# EAGLE board serial-adapter-board (EAGLE 5.07)
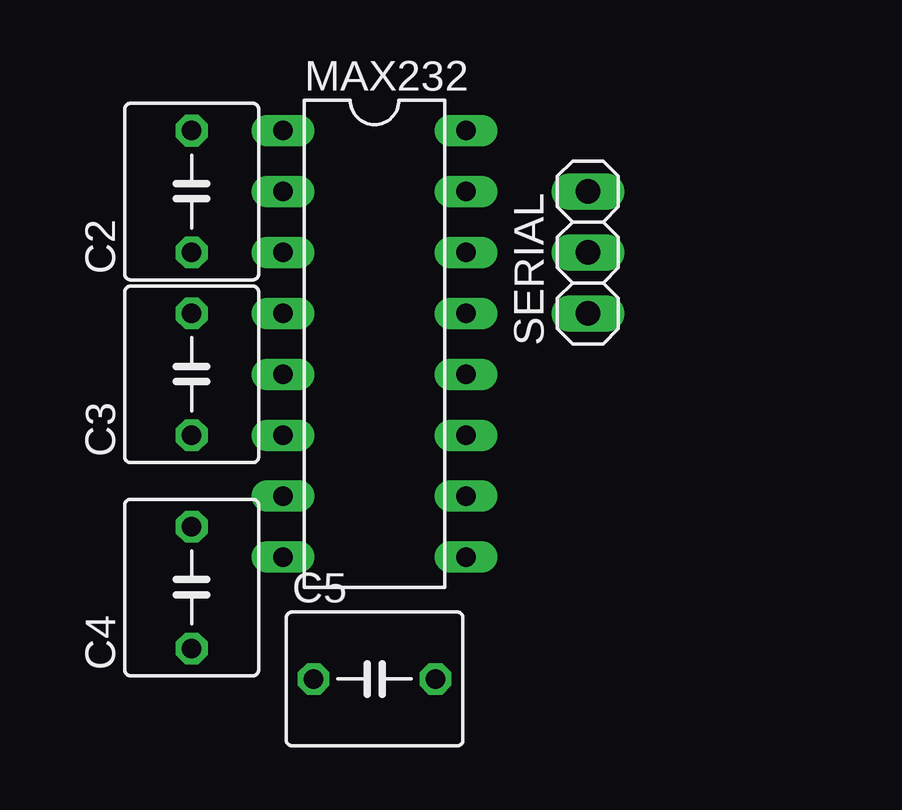
[diagram p0: board, top side]
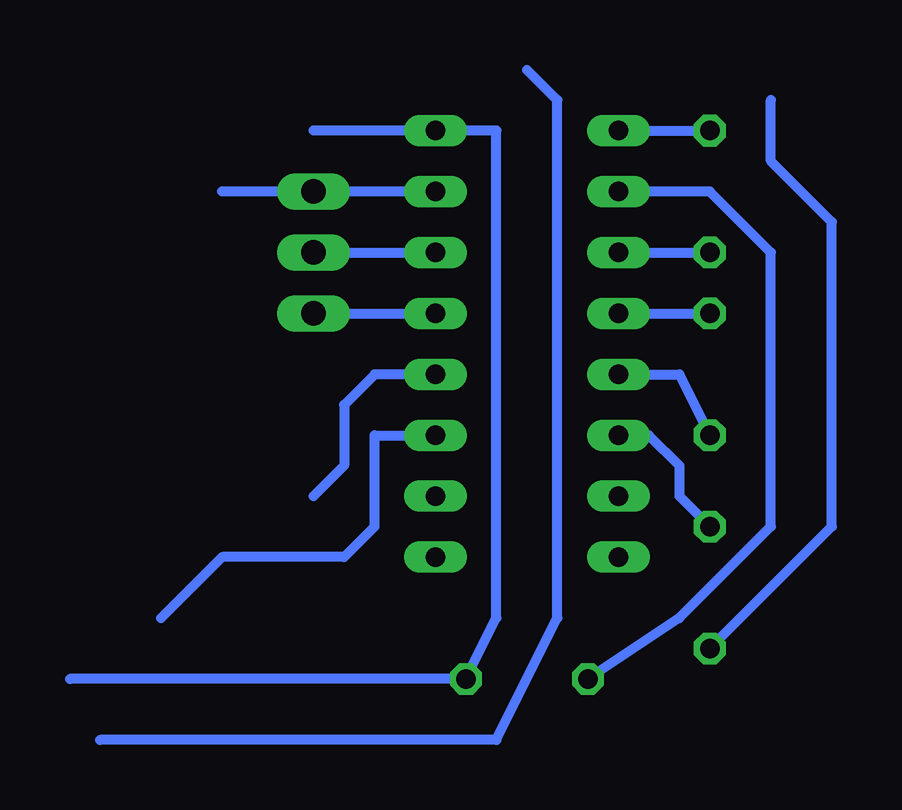
[diagram p1: board, bottom side, seen from below]

No outline drawn. Coordinates in mm, seen from the top.
Copper layers (1*16): Top 0.035mm / dielectric 1.5mm / Bottom 0.035mm
Design rules "default": minimum track width 10mil, minimum drill 24mil, track to track 8mil, track to pad 8mil, pad to pad 8mil, via to via 8mil, smd to smd 8mil, copper to edge 40mil, drill to drill 8mil, minimum pad ring 10mil, minimum via ring 8mil, stop-mask expansion 4mil, vias tented up to drill 0mil, thermal gap 10mil

## Footprints (pad centres in the part's own frame; a part is rotated, then mirrored left to right if it is on the bottom)
C050-055X075 = drill 0.813 octagon: 1 -2.54,0; 2 2.54,0
DIL16 = drill 0.813 long: 1 -8.89,-3.81; 2 -6.35,-3.81; 3 -3.81,-3.81; 4 -1.27,-3.81; 5 1.27,-3.81; 6 3.81,-3.81; 7 6.35,-3.81; 8 8.89,-3.81; 9 8.89,3.81; 10 6.35,3.81; 11 3.81,3.81; 12 1.27,3.81; 13 -1.27,3.81; 14 -3.81,3.81; 15 -6.35,3.81; 16 -8.89,3.81
1X03 = drill 1.016 long: 1 -2.54,0; 2 0,0; 3 2.54,0

## Placement (x,y rotation side)
C2  [C050-055X075]  7.62,25.4 90 top
C3  [C050-055X075]  7.62,17.78 90 top
C4  [C050-055X075]  7.62,8.89 90 top
C5  [C050-055X075]  15.24,5.08 0 top
MAX232  [DIL16]  15.24,19.05 270 top
SERIAL  [1X03]  24.13,22.86 90 top

## Library data of the parts
C2-C5 = resistor
MAX232 = maxim
SERIAL = pinhead

## Nets
S$3: C4.1
S$10: C2.2 MAX232.1
S$29: MAX232.12
S$31: MAX232.11
S$41: C2.1 MAX232.3
S$42: C3.2 MAX232.4
S$43: C3.1 MAX232.5
S$44: C4.2 MAX232.6
S$45: C5.1 MAX232.2

## Tracks (layer width: path | path; a pad name or v marks a point on that pad's centre or on a via)
POWER
  Bottom 0.406: 19.05,25.4 27.94,25.4
S$2
  Bottom 0.406: 25.4,22.86 19.05,22.86
S$3
  Bottom 0.406: 5.08,29.21 5.08,26.67 2.54,24.13 2.54,11.43 C4.1
S$10
  Bottom 0.406: MAX232.1 C2.2
S$28
  Bottom 0.406: 25.4,20.32 19.05,20.32
S$29
  Bottom 0.406: 24.13,12.7 22.86,13.97 22.86,16.51 21.59,17.78 MAX232.12
S$31
  Bottom 0.406: 30.48,7.62 27.94,10.16 22.86,10.16 21.59,11.43 21.59,15.24 MAX232.11
S$35
  Bottom 0.406: 15.24,30.48 13.97,29.21 13.97,7.62 16.51,2.54 33.02,2.54
S$39
  Bottom 0.406: 24.13,27.94 16.51,27.94 16.51,7.62 17.78,5.08 34.29,5.08
S$41
  Bottom 0.406: MAX232.3 C2.1
S$42
  Bottom 0.406: MAX232.4 C3.2
S$43
  Bottom 0.406: MAX232.5 8.89,17.78 C3.1
S$44
  Bottom 0.406: MAX232.6 10.16,15.24 8.89,13.97 8.89,12.7 C4.2
S$45
  Bottom 0.406: MAX232.2 7.62,25.4 5.08,22.86 5.08,11.43 8.89,7.62 C5.1